# Altium PCB PCB_Connections.PcbDoc
Units mm, origin at the board's own origin, x right, y up, seen from the top; angles counter-clockwise.
Board outline 40 x 60 mm, 2 copper layers (Top Layer, Bottom Layer); 16 components, 23 nets, 60 pads, 0 vias.
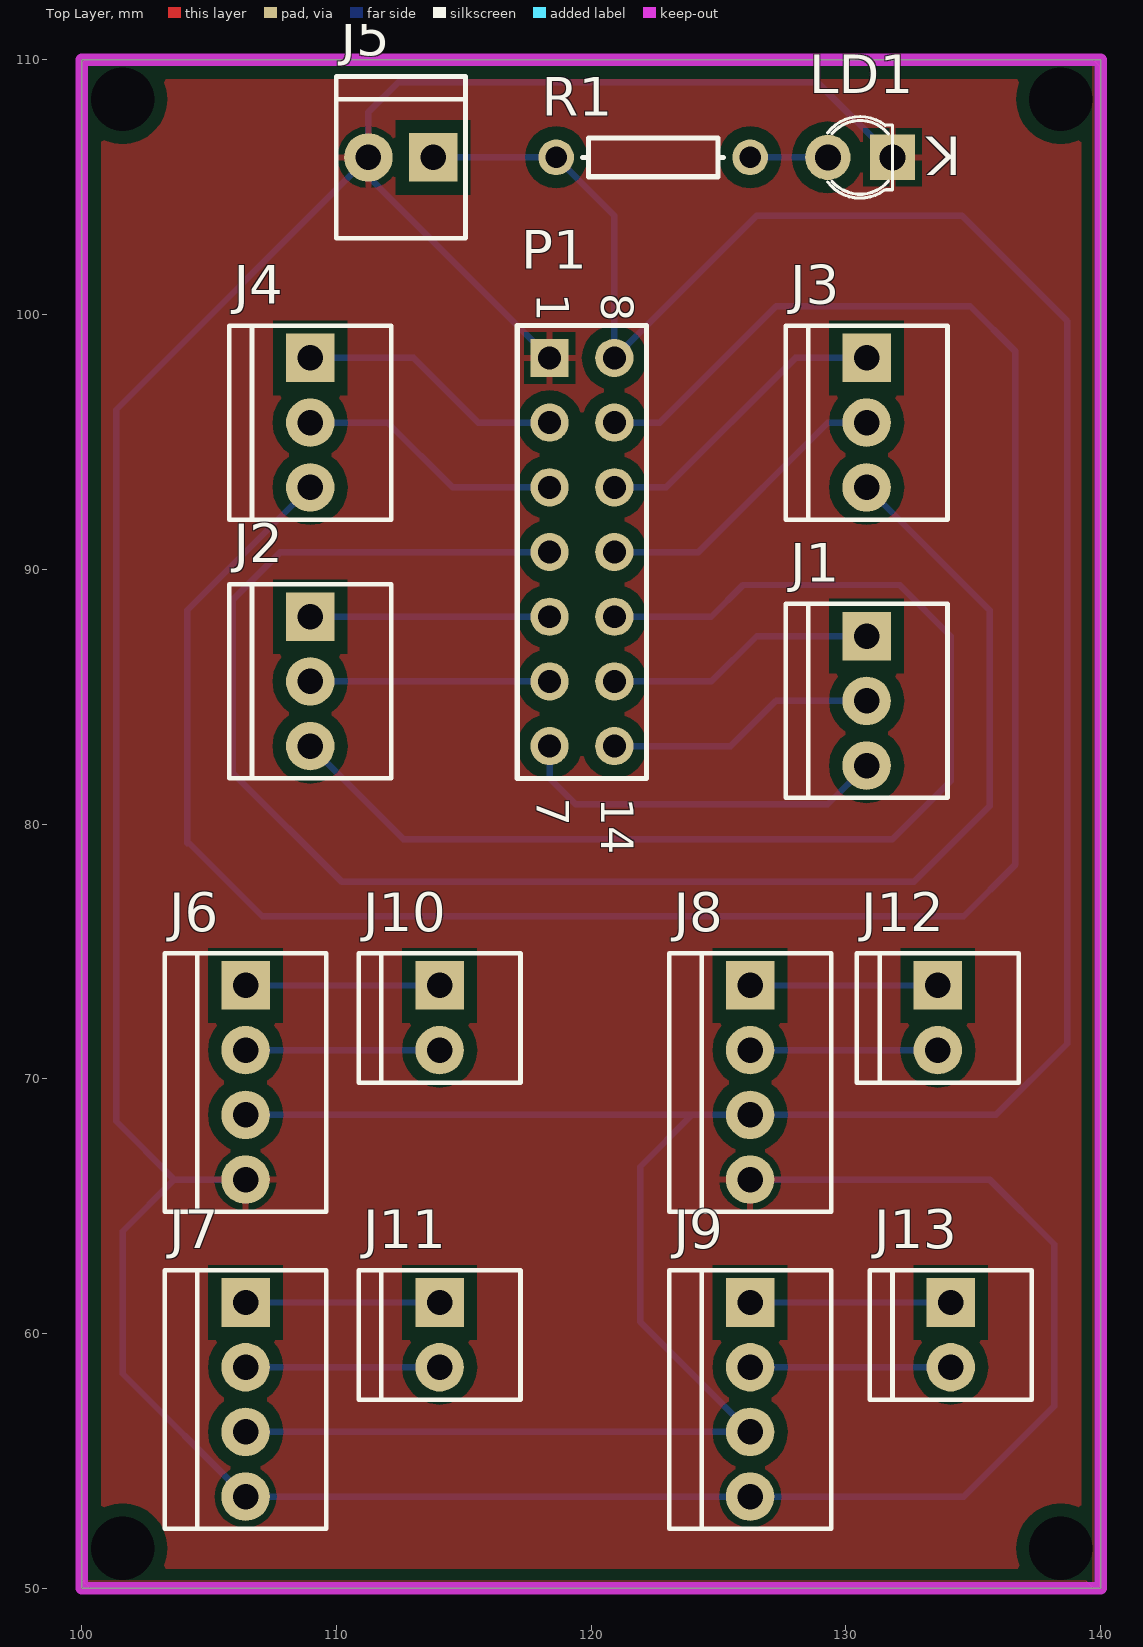
[diagram p0: Top Layer view]
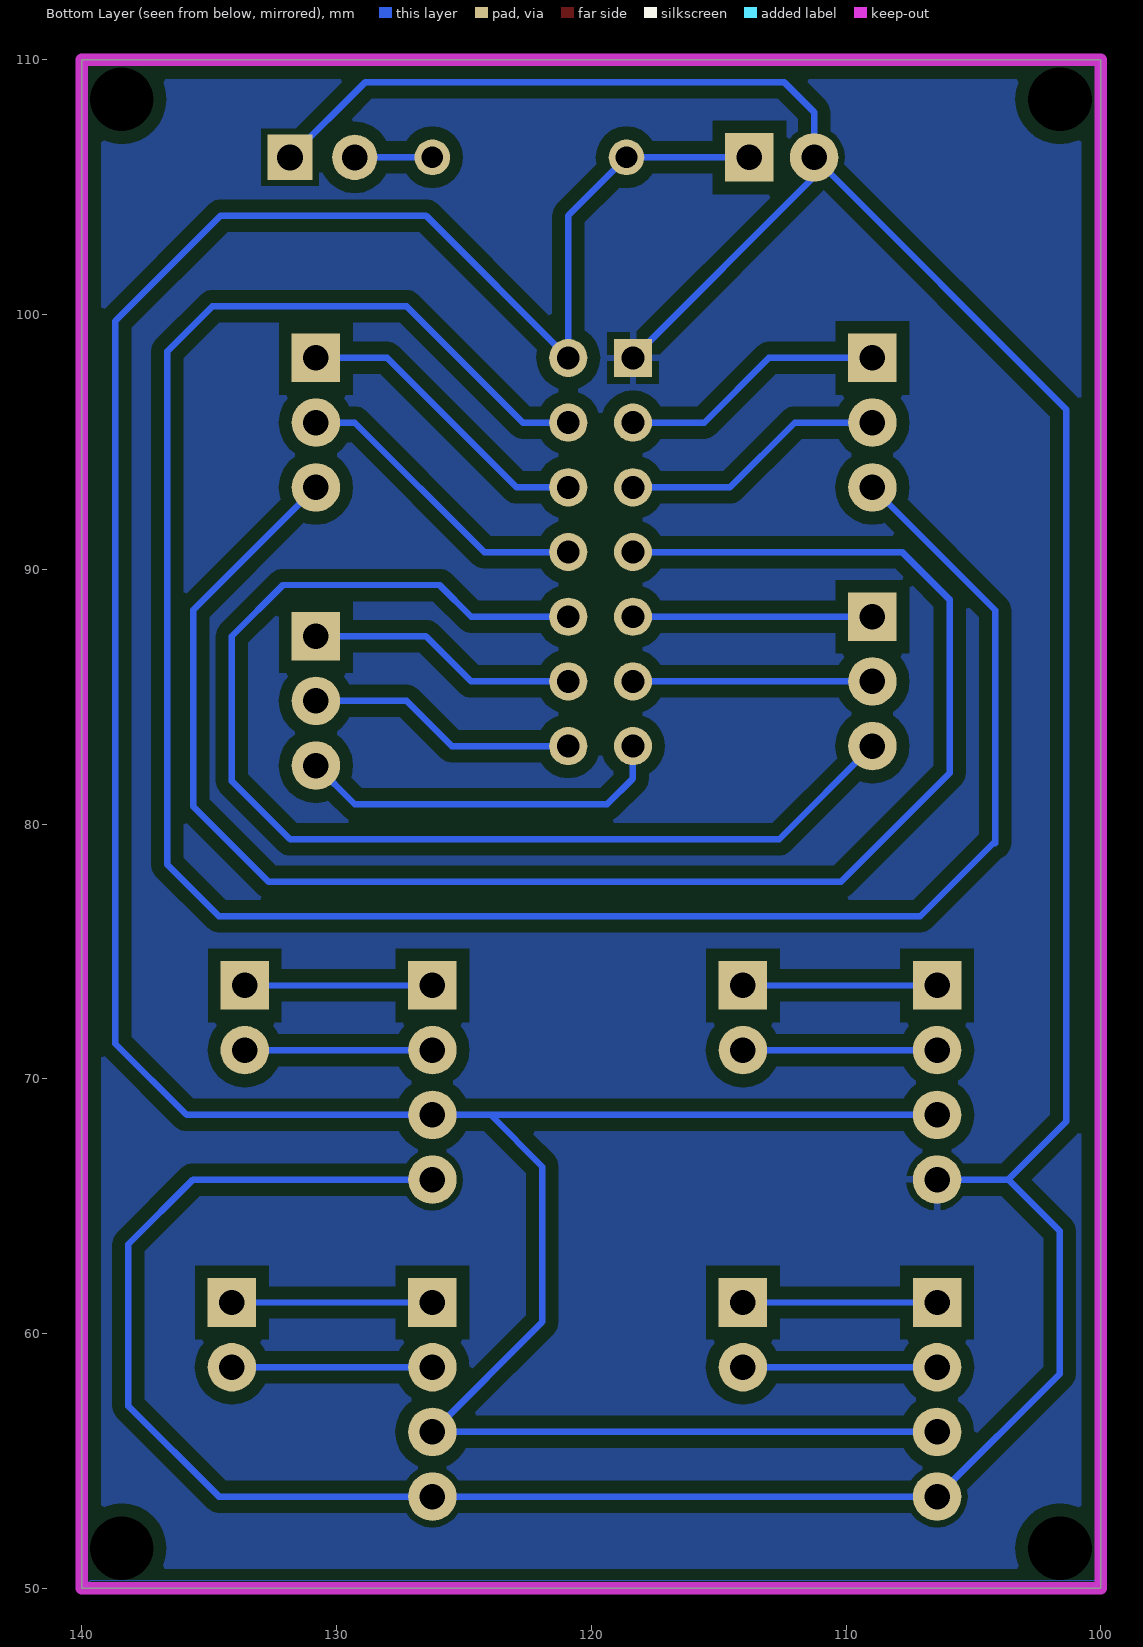
[diagram p1: Bottom Layer view, seen from below]

## Layer stack, top to bottom
Top Solder: solder mask 0.0102, Solder Resist, Dk 3.5
Top Layer: signal copper 0.0356
Dielectric 1: dielectric 0.32, FR-4, Dk 4.8
Bottom Layer: signal copper 0.0356
Bottom Solder: solder mask 0.0102, Solder Resist, Dk 3.5

## Board outline
100,50 100,110 140,110 140,50

## Design rules (kind name [scope] priority, off if disabled: settings)
Clearance [All] p1: gap=0.508
PolygonConnect [All] p1: connectstyle=Relief reliefconductorwidth=0.254 reliefentries=4 polygonreliefangle="90 Angle" airgapwidth=0.254
RoomDefinition Connections [InComponentClass('Connections')] p1 off: confinementstyle=ConfineIn formatcopy=TRUE lockcomponents=FALSE outline 167.513,25.908 167.513,142.113 142.494,142.113 142.494,25.908
RoutingLayers [All] p1: top layer_v5=FALSE bottom layer_v5=TRUE
RoutingVias [All] p1: holewidth=0.711 width=1.27 viastyle="Through Hole" minholewidth=0.711 minwidth=1.27 maxholewidth=0.711 maxwidth=1.27
SolderMaskExpansion [All] p1: expansion=0.102
Width [All] p1: maxlimit=0.254 minlimit=0.254 preferedwidth=0.254
29 further rules are at their usual default settings.

## Components (designator, comment, footprint, x,y, rotation, side; value= is the part's Value field where it differs from the comment)
J1 "Moteur1" "MTA100-3 M" 130.81,87.376 r180 top
J2 "Moteur2" "MTA100-3 M" 108.966,88.138 r180 top
J3 "Moteur3" "MTA100-3 M" 130.81,98.298 r180 top
J4 "Moteur4" "MTA100-3 M" 108.966,98.298 r180 top
J5 "Input" MTA100-2 113.792,106.172 r90 top
J6 "ENCODEUR1" "MTA100-4 MF" 106.426,73.66 r180 top (schematic designator j6)
J7 "ENCODEUR2" "MTA100-4 MF" 106.426,61.214 r180 top
J8 "ENCODEUR3" "MTA100-4 MF" 126.238,73.66 r180 top
J9 "ENCODEUR4" "MTA100-4 MF" 126.238,61.214 r180 top
J10 "MOTEUR1" MTA100-2 114.046,73.66 r180 top
J11 "MOTEUR2" MTA100-2 114.046,61.214 r180 top
J12 "MOTEUR3" MTA100-2 133.604,73.66 r180 top
J13 "MOTEUR4" MTA100-2 134.112,61.214 r180 top
LD1 "Power Good" "LED 3mm Vertical" 130.556,106.172 r90 top
P1 "Header 7X2A" HDR2X7_CEN 118.364,98.298 r270 top
R1 "Res1" AXIAL-0.3 122.428,106.172 r180 top

## Footprints (in the part's own frame and the unit in brackets; to place one, negate y for a bottom-side part, rotate by r counter-clockwise, add the part's x,y. Pads: shape width x height; smd on the part's side, far side on the other; paste and mask are expansions set on the pad)
AXIAL-0.3 [mm] "Axial Device, Thru-Hole; 2 Leads; 0.3 in Pin Spacing"
  round 1.4 hole 0.85: 1(-3.81,0) 2(3.81,0)
  silkscreen extent -2.77,-0.76 2.77,0.76
HDR2X7_CEN [mm] "Connector; Header; 7x2 Position"
  rect 1.5x1.5 hole 0.9: 1(0,0)
  round 1.5 hole 0.9: 2(2.54,0) 3(5.08,0) 4(7.62,0) 5(10.16,0) 6(12.7,0) 7(15.24,0) 8(0,2.54) 9(2.54,2.54) 10(5.08,2.54) 11(7.62,2.54) 12(10.16,2.54) 13(12.7,2.54) 14(15.24,2.54)
  silkscreen extent -1.27,-1.27 16.51,3.81
"LED 3mm Vertical" [mil] "LED 3mm Vertical"
  round 70 hole 40: 1(0,50)
  rect 70x70 hole 40: 2(0,-50)
  silkscreen extent -63,-50 63,50, body extent -68,-75 69,69, height 242
MTA100-2 [mm] "MTA100-2 M"
  rect 1.905x1.905 hole 1.001: 1(0,0)
  round 1.905 hole 1.001: 2(0,2.54)
  silkscreen extent -3.18,-1.27 3.17,3.81, body extent -3.18,-1.27 3.17,3.81, height 2.54
"MTA100-3 M" [mm] "MTA100-3 M"
  rect 1.905x1.905 hole 1.001: 1(0,0)
  round 1.905 hole 1.001: 2(0,2.54) 3(0,5.08)
  silkscreen extent -3.18,-1.27 3.17,6.35, body extent -3.18,-1.27 3.17,6.35, height 2.54
"MTA100-4 MF" [mm] "MTA100-4 MF"
  rect 1.905x1.905 hole 1.001: 1(0,0)
  round 1.905 hole 1.001: 2(0,2.54) 3(0,5.08) 4(0,7.62)
  silkscreen extent -3.18,-1.27 3.17,8.89, body extent -3.18,-1.27 3.17,8.89, height 15.93

## Part data
J1 J2 J3 J4: library part MTA100-3, "MTA Male 0 Degres"
J5 J10 J11 J12 J13: library part MTA100-2, "MTA Male 0 Degres"
J6 J7 J8 J9: library part MTA100-4, "MTA100-4M"
LD1: library part "LED 3mm Vertical", "Through Hole"
P1: "Header, 7-Pin, Dual row"
R1: "Resistor"

## Free pads (board coordinates)
  round 1.524 hole 2.5: 0(138.43,108.458) 1(101.6,108.458) 2(138.43,51.562) 3(101.6,51.562)

## Nets (pads, with @x,y where several pads share a name; then routed paths per layer and width w, separated by ;. In a path a pad name is that pad's centre, name@x,y a point inside that pad or via, vN(x,y) a via of type N, cw(c..) or ccw(c..) an arc to the next point about the centre after c; other vN are vias at no path point)
5V: J5.1 J6.3 J7.3 J8.3 J9.3 P1.8 R1.2 | length 134.4
  Bottom Layer w0.254: J7.3 J9.3 121.92,60.452 121.92,66.548 123.952,68.58 J8.3 ; J6.3 J8.3 ; J5.1 R1.2 120.904,103.886 P1.8 126.492,103.886 134.543,103.886 138.684,99.745 138.684,71.374 135.89,68.58 J8.3
ENC1: J6.2 J10.2 | length 7.6
  Bottom Layer w0.254: J6.2 J10.2
ENC1DEPH: J6.1 J10.1 | length 7.6
  Bottom Layer w0.254: J6.1 J10.1
ENC2: J7.2 J11.2 | length 7.6
  Bottom Layer w0.254: J7.2 J11.2
ENC2DEPH: J7.1 J11.1 | length 7.6
  Bottom Layer w0.254: J7.1 J11.1
ENC3: J8.2 J12.2 | length 7.4
  Bottom Layer w0.254: J8.2 J12.2
ENC3DEPH: J8.1 J12.1 | length 7.4
  Bottom Layer w0.254: J8.1 J12.1
ENC4: J9.2 J13.2 | length 7.9
  Bottom Layer w0.254: J9.2 J13.2
ENC4DEPH: J9.1 J13.1 | length 7.9
  Bottom Layer w0.254: J9.1 J13.1
GND: J5.2 J6.4 J7.4 J8.4 J9.4 LD1.2 P1.1 | length 150.7
  Bottom Layer w0.254: J6.4 103.632,66.04 ; P1.1 111.252,105.41 J5.2 ; J8.4 135.636,66.04 138.176,63.5 138.176,57.15 134.62,53.594 J9.4 J7.4 101.6,58.42 101.6,64.008 103.632,66.04 ; LD1.2 128.883,109.115 112.417,109.115 111.252,107.95 J5.2 ; 103.632,66.04 101.346,68.326 101.346,96.266 J5.2
M1P1: J1.2 P1.14 | length 10.6
  Bottom Layer w0.254: P1.14 125.476,83.058 127.254,84.836 J1.2
M1P2: J1.1 P1.13 | length 10.6
  Bottom Layer w0.254: P1.13 124.714,85.598 126.492,87.376 J1.1
M1SC: J1.3 P1.7 | length 14.8
  Bottom Layer w0.254: P1.7 118.364,81.788 119.38,80.772 129.286,80.772 J1.3
M2P1: J2.2 P1.6 | length 9.4
  Bottom Layer w0.254: J2.2 P1.6
M2P2: J2.1 P1.5 | length 9.4
  Bottom Layer w0.254: J2.1 P1.5
M2SC: J2.3 P1.12 | length 47.9
  Bottom Layer w0.254: J2.3 112.624,79.4 131.826,79.4 134.112,81.686 134.112,87.376 132.105,89.383 125.959,89.383 124.714,88.138 123.698,88.138 P1.12
M3P1: J3.2 P1.11 | length 12
  Bottom Layer w0.254: P1.11 124.206,90.678 129.286,95.758 J3.2
M3P2: J3.1 P1.10 | length 12
  Bottom Layer w0.254: P1.10 122.936,93.218 128.016,98.298 J3.1
M3SC: J3.3 P1.4 | length 67.3
  Bottom Layer w0.254: P1.4 107.798,90.678 105.918,88.798 105.918,82.017 110.211,77.724 132.664,77.724 135.636,80.696 135.636,88.392 J3.3
M4P1: J4.2 P1.3 | length 10.5
  Bottom Layer w0.254: J4.2 112.014,95.758 114.554,93.218 P1.3
M4P2: J4.1 P1.2 | length 10.5
  Bottom Layer w0.254: J4.1 113.03,98.298 115.57,95.758 P1.2
M4SC: J4.3 P1.9 | length 89
  Bottom Layer w0.254: 104.14,79.248 104.14,88.392 J4.3 ; 104.178,79.286 107.086,76.378 134.62,76.378 136.652,78.41 136.652,98.552 134.874,100.33 127.254,100.33 122.682,95.758 P1.9
NetLD1_1: LD1.1 R1.1 | length 3
  Bottom Layer w0.254: R1.1 LD1.1

## Polygon pours and split planes (outlines as drawn)
GND on Top Layer "Top Layer-No Net" (solid, pour order 16): 100.076,110 100,109.924 100,50.292 139.662,50.292 139.954,50 139.954,110
GND on Top Layer "Top Layer-No Net" (solid, shelved, pour order 12): 100,110 100,50.292 139.408,50.292 139.7,50 139.7,110
GND on Top Layer "Top Layer-No Net" (solid, shelved, pour order 10): 100,110 100.076,109.924 100.076,50 140,50 140,110
GND on Top Layer "Top Layer-No Net" (solid, shelved, pour order 14): 100,110 100.076,109.924 100.076,50 139.954,50 140,50.046 140,109.982
GND on Top Layer "Top Layer-No Net" (solid, shelved, pour order 18): 100.076,110 100.076,50.254 100.33,50 139.954,50 139.954,109.746 139.7,110
GND on Bottom Layer "Top Layer-No Net" (solid, pour order 13): 100.076,110 100.076,50.076 100,50 100.038,50.038 140,50.038 140,109.954 139.954,110
GND on Bottom Layer "Top Layer-No Net" (solid, shelved, pour order 11): 100,110 100,50.076 100.076,50 140,50 140,110
GND on Bottom Layer "Top Layer-No Net" (solid, shelved, pour order 15): 100.076,110 100.076,50.368 100,50.292 100.292,50 139.954,50 139.954,110
GND on Bottom Layer "Top Layer-No Net" (solid, shelved, pour order 17): 100,110 100,50.292 139.662,50.292 139.954,50 139.954,110

## Keep-outs
Keep-Out Layer:
  lines w0.5: 100,50 140,50 140,110 100,110 100,100 100,50

## Silkscreen, mask and mechanical layers (free items; w line width, h text height)
Mechanical 1:
  text "Alim" at 104.14,107.95 h1.52
  text "5V" at 106.68,105.664 h1.52
  text "Ctrl M3" at 135.89,100.838 h1.52 r270
  text "Ctrl M4" at 104.14,92.456 h1.52 r90
  text "Ctrl M1" at 135.636,88.392 h1.52 r270
  text "Ctrl M2" at 104.394,80.264 h1.52 r90
  text "ENCO1" at 110.744,76.454 h1.52
  text "ENCO3" at 130.607,75.794 h1.52
  text "OUT" at 112.014,68.326 h1.52
  text "ENCO1" at 102.616,67.818 h1.52 r90
  text "OUT" at 132.08,67.564 h1.52
  text "ENCO3" at 122.174,66.294 h1.52 r90
  text "ENCO2" at 110.744,63.246 h1.52
  text "ENCO4" at 130.861,63.094 h1.52
  text "OUT" at 112.268,55.372 h1.52
  text "OUT" at 132.08,55.118 h1.52
  text "ENCO2" at 102.616,53.848 h1.52 r90
  text "ENCO4" at 122.174,53.594 h1.52 r90

## Text inside footprints (layer, text, board x,y; h text height)
LD1: Top Overlay "K" at 134.518,106.985 h1.52 r180
P1: Top Overlay "14" at 120.396,81.026 h1.27 r270; Top Overlay "7" at 117.856,81.026 h1.27 r270; Top Overlay "1" at 117.856,100.838 h1.27 r270; Top Overlay "8" at 120.396,100.838 h1.27 r270